# Altium PCB nse5310-module.PcbDoc
Units mm, origin at the board's own origin, x right, y up, seen from the top; angles counter-clockwise.
Board outline 25 x 25 mm, 2 copper layers (Top Layer, Bottom Layer), stack 1.581 mm thick; 20 components, 21 nets, 115 pads, 21 vias.
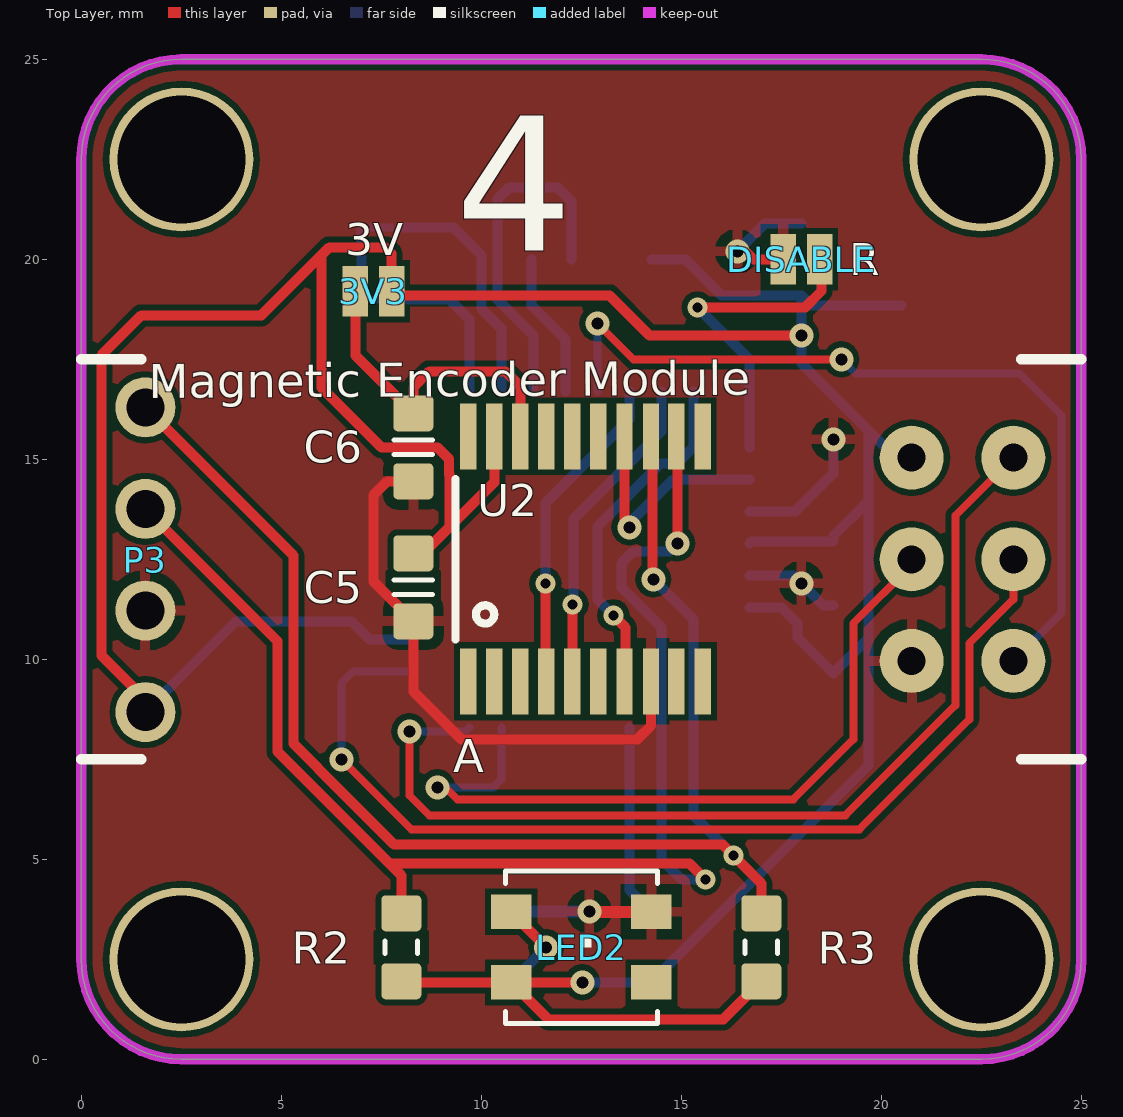
[diagram p0: Top Layer view]
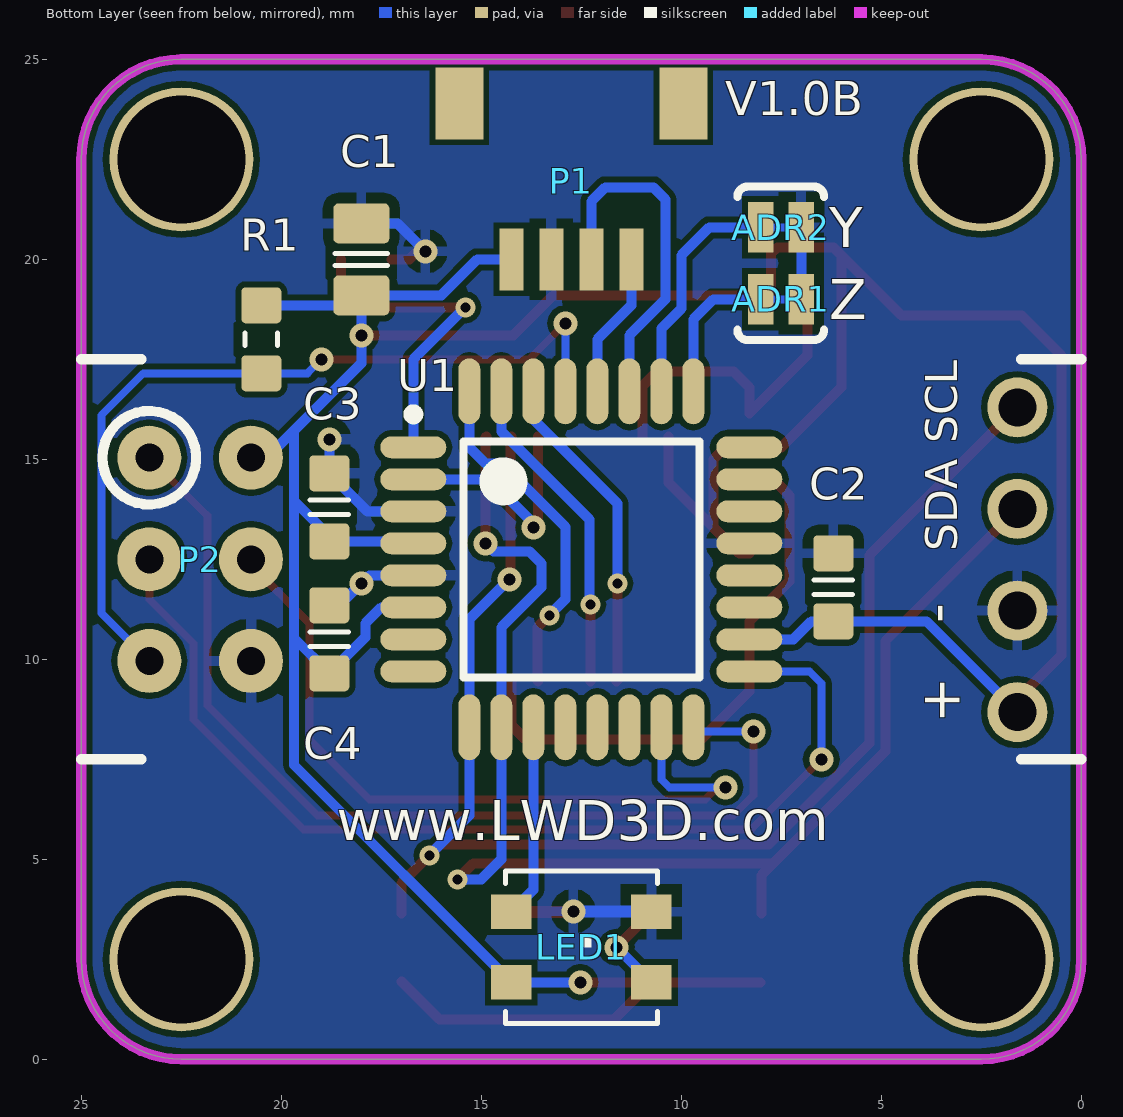
[diagram p1: Bottom Layer view, seen from below]
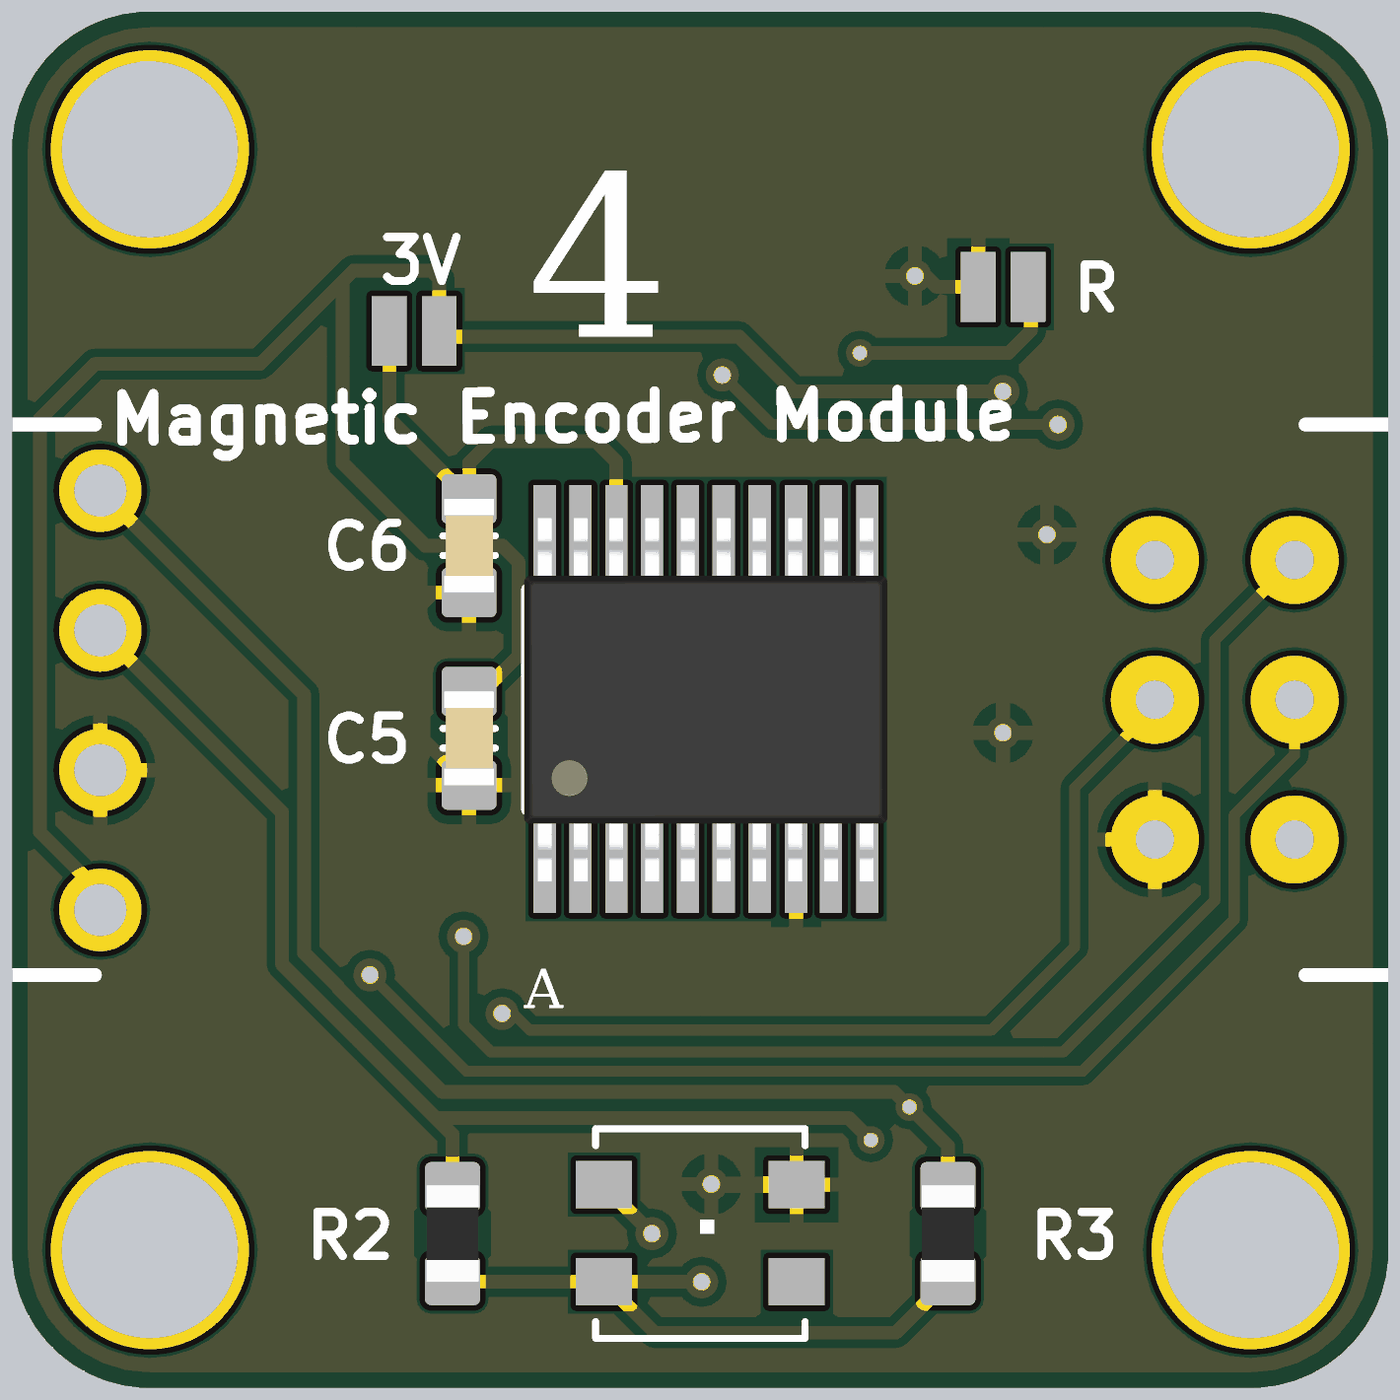
[diagram p2: 3D render of the assembled board from above, using the file's embedded part models]
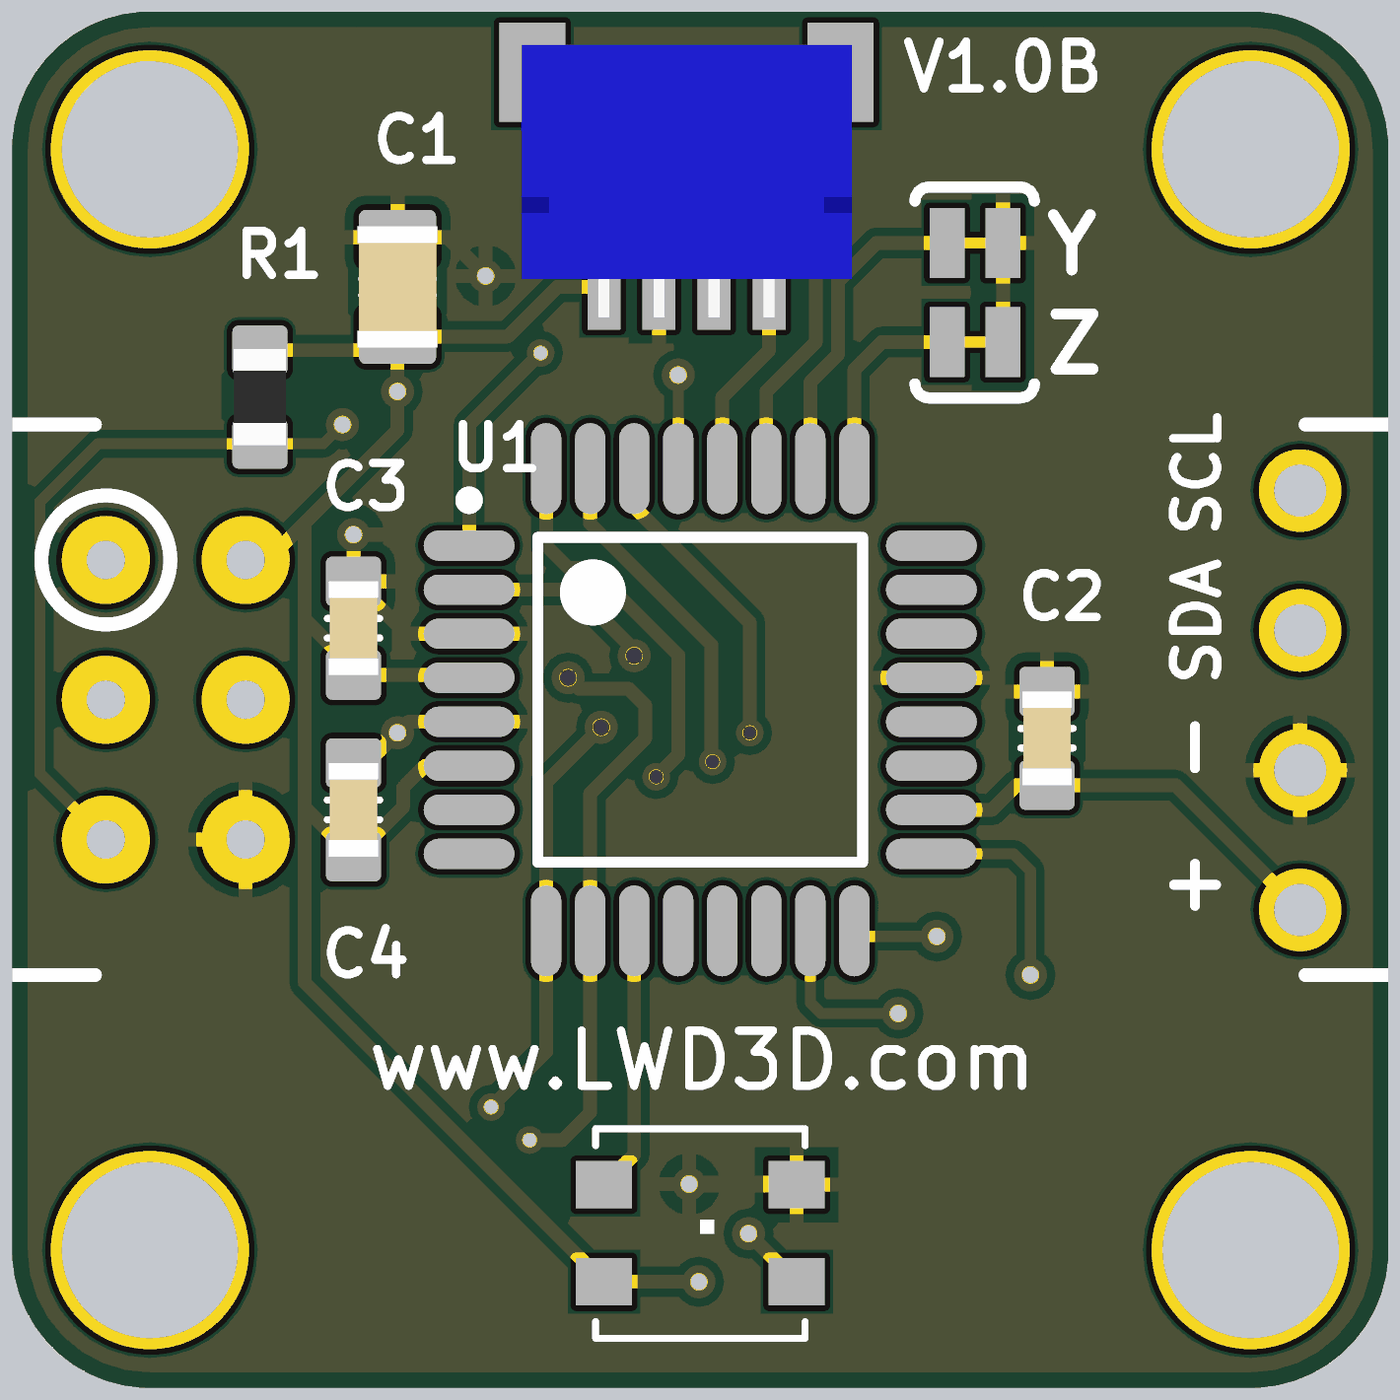
[diagram p3: 3D render of the assembled board from below, using the file's embedded part models]

## Layer stack, top to bottom
Top Solder: solder mask 0.0102, Solder Resist, Dk 3.5
Top Layer: signal copper 0.0356
Dielectric1: dielectric 1.51, FR-4, Dk 4.8
Bottom Layer: signal copper 0.0356
Bottom Solder: solder mask 0.0102, Solder Resist, Dk 3.5

## Board outline
0,2.5 0,22.5 cw(c2.5,22.5) 2.5,25 22.5,25 cw(c22.5,22.5) 25,22.5 25,2.5 cw(c22.5,2.5) 22.5,0 2.5,0 cw(c2.5,2.5)

## Design rules (kind name [scope] priority, off if disabled: settings)
Clearance [All] p1: gap=0.15
FabricationTestPointUsage TestPointUsage [All] p1: valid=0 allowmultiple=FALSE
FabricationTestpoint Testpoint [All] p1: side=3 testpointundercomponent=TRUE minsize=1.016 maxsize=2.54 preferedsize=1.524 minholesize=0 maxholesize=1.016 preferedholesize=0.813 testpointgrid=0.025 allowsidetop=TRUE allowsidebottom=TRUE usegrid=TRUE gridtolerance=0
HoleSize [All] p1: absolutevalues=TRUE maxlimit=3.5 minlimit=0.025 maxpercent=80.000 minpercent=20.000
PolygonConnect [All] p1: connectstyle=Relief reliefconductorwidth=0.254 reliefentries=4 polygonreliefangle="90 Angle" airgapwidth=0.254
RoutingVias [All] p1: holewidth=0.25 width=0.5 viastyle="Through Hole" minholewidth=0.25 minwidth=0.5 maxholewidth=1 maxwidth=1.4
SilkToSolderMaskClearance SilkscreenOverComponentPads [IsPad] p1: minsilkscreentomaskgap=0.254 clearancetoexposedcopper=TRUE
SolderMaskExpansion [All] p1: expansion=0.102
Width [All] p1: maxlimit=1 minlimit=0.2 preferedwidth=0.25
26 further rules are at their usual default settings.

## Components (designator, comment, footprint, x,y, rotation, side; value= is the part's Value field where it differs from the comment)
3V3 "JUMPER-PAD-2-NO" PAD-JUMPER-2-NO_NO_SILK 7.3,19.2 r0 top
ADR1 "JUMPER-PAD-2-NC_BY_TRACE" PAD-JUMPER-2-NC_BY_TRACE_YES_SILK 7.508,19 r0 bottom
ADR2 "JUMPER-PAD-2-NC_BY_TRACE" PAD-JUMPER-2-NC_BY_TRACE_YES_SILK 7.508,20.8 r0 bottom
C1 "approved sub OK" CAPC2012X135N 18,20 r90 bottom
C2 "approved sub OK" CAPC1608X90N 6.2,11.8 r90 bottom
C3 "approved sub OK" CAPC1608X90N 18.8,13.8 r90 bottom
C4 "approved sub OK" CAPC1608X90N 18.8,10.5 r90 bottom
C5 "approved sub OK" CAPC1608X90N 8.3,11.8 r270 top
C6 "approved sub OK" CAPC1608X90N 8.3,15.3 r270 top
DISABLE "JUMPER-PAD-2-NO" PAD-JUMPER-2-NO_NO_SILK 18,20 r0 top
LED1 "WS2812B3535" LED3535 12.5,2.8 r180 bottom
LED2 "WS2812B3535" LED3535 12.5,2.8 r0 top
P1 "JST-SH 4P" SM04B-SRSS-TB 14.25,20 r90 bottom
P2 "ISP" "ICSP Pads" 23.3,15.04 r180 bottom
P3 "Header 4" HDR1X4 1.6,16.3 r270 top
R1 "Thick Film" RESC1608X55N 20.5,18 r270 bottom
R2 "Thick Film" RESC1608X55N 8,2.8 r90 top
R3 "Thick Film" RESC1608X55N 17,2.8 r90 top
U1 "ATmega328-AU" 32A_N 12.5,12.5 r180 bottom
U2 "NSE-5310" NSE-5310 13.25,12.5 r0 top

## Footprints (in the part's own frame and the unit in brackets; to place one, negate y for a bottom-side part, rotate by r counter-clockwise, add the part's x,y. Pads: shape width x height; smd on the part's side, far side on the other; paste and mask are expansions set on the pad)
32A_N [mm] "Thin QFP, 32-Leads, Body 7x7mm, Pitch 0.8mm, IPC Medium Density"
  oval 1.65x0.55 smd: 1(-4.2,2.8) 2(-4.2,2) 3(-4.2,1.2) 4(-4.2,0.4) 5(-4.2,-0.4) 6(-4.2,-1.2) 7(-4.2,-2) 8(-4.2,-2.8) 17(4.2,-2.8) 18(4.2,-2) 19(4.2,-1.2) 20(4.2,-0.4) 21(4.2,0.4) 22(4.2,1.2) 23(4.2,2) 24(4.2,2.8)
  oval 0.55x1.65 smd: 9(-2.8,-4.2) 10(-2,-4.2) 11(-1.2,-4.2) 12(-0.4,-4.2) 13(0.4,-4.2) 14(1.2,-4.2) 15(2,-4.2) 16(2.8,-4.2) 25(2.8,4.2) 26(2,4.2) 27(1.2,4.2) 28(0.4,4.2) 29(-0.4,4.2) 30(-1.2,4.2) 31(-2,4.2) 32(-2.8,4.2)
  silkscreen extent -4.33,-2.95 2.95,3.75, body extent -3.5,-3.5 3.5,3.5, height 1.2
CAPC1608X90N [mm] "Chip Capacitor, Body 1.6x0.8mm, EIA 0603, IPC Medium Density"
  round 0.254 on Mech15: 0(0,0)
  rrect25% 0.9x1 smd: 1(-0.85,0) 2(0.85,0)
  Top Layer pour cut-out: -0.6,0.5 -0.4,0.7 0.4,0.7 0.6,0.5 0.6,-0.5 0.4,-0.7 -0.4,-0.7 -0.6,-0.5
  silkscreen extent -0.18,-0.48 0.18,0.48, body extent -0.85,-0.45 0.85,0.45, height 0.89
CAPC2012X135N [mm] "Chip Capacitor, Body 2.0x1.2mm, EIA 0805, IPC Medium Density"
  round 0.254 on Mech15: 0(0,0)
  rrect25% 1x1.4 smd: 1(-0.9,0) 2(0.9,0)
  Top Layer pour cut-out: -0.675,0.7 -0.475,0.9 0.475,0.9 0.675,0.7 0.675,-0.7 0.475,-0.9 -0.475,-0.9 -0.675,-0.7
  silkscreen extent -0.15,-0.65 0.15,0.65, body extent -1.1,-0.72 1.1,0.73, height 1.34
HDR1X4 [mm] "Connector; Header; 4 Position"
  round 1.5 hole 0.95: 1(0,0) 2(2.54,0) 3(5.08,0) 4(7.62,0)
"ICSP Pads" [mm]
  round 1.6 hole 0.7: 0(0,0) 1(2.54,0) 2(0,-2.54) 3(2.54,-2.54) 4(0,-5.08) 5(2.54,-5.08)
  silkscreen extent -1.17,-1.17 1.17,1.17
LED3535 [mil]
  rect 40x34 smd: 1(-68.9,35) 2(-68.9,-34.45) 3(69,-34.45) 4(69,35)
  silkscreen extent -75,-75 75,75
NSE-5310 [mil]
  rect 16x65 smd: 1(-140.75,-120.08) 2(-115.16,-120.08) 3(-89.57,-120.08) 4(-63.98,-120.08) 5(-38.39,-120.08) 6(-12.8,-120.08) 7(13,-120.08) 8(39,-120.08) 9(64,-120.08) 10(90,-120.08) 11(90,121) 12(64,121) 13(39,121) 14(13,121) 15(-12.8,121) 16(-38.39,121) 17(-63.98,121) 18(-89.57,121) 19(-115.16,121) 20(-140.75,121)
  silkscreen extent -154,-79 -115,79, body extent -156,-130 104,130, height 47
PAD-JUMPER-2-NC_BY_TRACE_YES_SILK [mm]
  rect 0.635x1.27 smd: 1(-0.508,0) 2(0.508,0)
  silkscreen extent -1.08,0.76 1.09,1.02
PAD-JUMPER-2-NO_NO_SILK [mm]
  rect 0.635x1.27 smd: 1(-0.45,0) 2(0.457,0)
RESC1608X55N [mm] "Chip Resistor, Body 1.6x0.8mm, EIA 0603, IPC Medium Density"
  round 0.254 on Mech15: 0(0,0)
  rrect25% 0.9x1 smd: 1(-0.85,0) 2(0.85,0)
  Top Layer pour cut-out: -0.6,0.5 -0.4,0.7 0.4,0.7 0.6,0.5 0.6,-0.5 0.4,-0.7 -0.4,-0.7 -0.6,-0.5
  silkscreen extent -0.15,-0.41 0.15,0.41, body extent -0.87,-0.47 0.88,0.48, height 0.54
SM04B-SRSS-TB [mm]
  rect 1.55x0.6 smd: 0(0,0) 1(0,-1) 2(0,-2) 3(0,-3)
  rect 1.8x1.2 smd: ""(3.9,-4.3) ""(3.9,1.3)
  body extent -0.55,-4.5 4.4,1.5, height 2.96

## Part data
C1: library part CAPC_10u_0805_10V, "Capacitor SMD Cer 10uF 10% 10V X5R 0805"
C2 C3 C4 C5: library part CAPC_100n_0603_X7R_50V_10%, "Capacitor SMD Cer 100nF 10% 50V X7R 0603"
C6: library part CAPC_2u2_0603_10V_10%, "Capacitor SMD Cer 2.2uF 10% 10V X5R 0603"
P1: library part SM04B-SRSS-TB
P2: library part "ISP Header"
P3: "Header, 4-Pin"
R1: library part RES_10K_0603_5%, "Resistor SMD chip 10k Ohm 0.1W 5% 0603"
R2 R3: library part RES_3K3_0603_5%, "Resistor SMD chip 3.3k Ohm 0.1W 5% 0603"
U1: "8-bit AVR Microcontroller, 32KB Flash, 1KB EEPROM, 2KB SRAM, 32-pin TQFP, Industrial Grade (-40°C to 85°C)"

## Free pads (board coordinates)
  round 3.6 hole 3.2: 0(2.5,2.5) 0(2.5,22.5) 0(22.5,2.5) 0(22.5,22.5)

## Via types
v1: diameter 0.6, hole 0.3, Top Layer to Bottom Layer, tented both sides, 15 vias
v2: diameter 0.5, hole 0.25, Top Layer to Bottom Layer, tented both sides, 6 vias

## Nets (pads, with @x,y where several pads share a name; then routed paths per layer and width w, separated by ;. In a path a pad name is that pad's centre, name@x,y a point inside that pad or via, vN(x,y) a via of type N, cw(c..) or ccw(c..) an arc to the next point about the centre after c; other vN are vias at no path point)
A: U1.30 U2.4 | length 8.1
  Top Layer w0.25: v2(11.6,11.9) 11.6,9.475 U2.4
  Bottom Layer w0.25: v2(11.6,11.9) 11.6,13.9 13.7,16 U1.30
ADR1: ADR1.2 U1.25 | length 3.5
  Bottom Layer w0.25: ADR1.2@8.183,19 9.2,19 9.7,18.5 U1.25
ADR2: ADR2.2 U1.26 | length 5.9
  Bottom Layer w0.25: ADR2.2 9.3,20.8 10,20.1 10,18.766 10.5,18.266 U1.26
B: U1.31 U2.5 | length 8.2
  Top Layer w0.25: U2.5 v2(12.275,11.375)
  Bottom Layer w0.25: v2(12.275,11.375) 12.3,11.4 12.3,13.5 14.5,15.7 U1.31
CLK: P3.1 R3.2 U1.9 U2.13 | length 35.2
  Top Layer w0.25: P3.1 5.3,12.6 5.3,7.9 5.925,7.275 5.925,7.262 7.812,5.375 16.025,5.375 v2(16.3,5.1) 17,4.4 R3.2 ; U2.13 14.275,15.539 14.275,12.025 v1(14.3,12)
  Bottom Layer w0.25: v1(14.3,12) 15.3,11 U1.9 15.3,6.1 v2(16.3,5.1)
CSN: U1.2 U2.14 | length 5.9
  Top Layer w0.25: U2.14 13.58,13.42 v1(13.7,13.3)
  Bottom Layer w0.25: v1(13.7,13.3) 13.7,13.4 14.8,14.5 U1.2
DIO: P3.2 R2.2 U1.10 U2.12 | length 34.2
  Top Layer w0.25: P3.2 4.9,10.46 4.9,7.7 7.7,4.9 ; R2.2 8,4.6 7.7,4.9 ; U2.12 14.9,15.549 v1(14.9,12.9) ; v2(15.6,4.5) 15.2,4.9 7.7,4.9
  Bottom Layer w0.25: v1(14.9,12.9) 14.7,12.7 13.8,12.7 13.5,12.4 13.5,11.8 14.5,10.8 U1.10 14.5,5 15,4.5 v2(15.6,4.5)
GND: ADR1.1 ADR2.1 C1.2 C2.2 C3.2 C4.2 C5.2 C6.2 DISABLE.1 LED1.4 LED2.4 P1.1 P2.5 P3.3 U1.3 U1.5 U1.21 U2.8 | length 28
  Top Layer w0.25: C6.2 7.65,14.45 7.3,14.1 7.3,11.95 C5.2 8.3,9.2 9.5,8 13.9,8 14.241,8.341 U2.8 ; v1(16.4,20.2) 16.6,20.2 16.8,20 DISABLE.1@17.242,20
  Top Layer w0.3: v1(12.7,3.7) 12.711,3.689 LED2.4
  Bottom Layer w0.25: ADR1.1 ADR2.1 ; v1(16.4,20.2) 17.1,20.9 C1.2 ; U1.5 17.8,12.1 v1(18,11.9) 18.55,11.35 C4.2 ; U1.3 17.85,13.7 C3.2 v1(18.8,15.5)
  Bottom Layer w0.3: LED1.4@10.758,3.7 v1(12.7,3.7)
I: U1.32 U2.7 | length 8.8
  Top Layer w0.25: v2(13.3,11.1) 13.6,10.8 13.6,9.47 U2.7
  Bottom Layer w0.25: v2(13.3,11.1) 12.9,11.5 12.9,13.313 14.487,14.9 14.9,14.9 15.3,15.3 U1.32
MISO: P2.0 U1.16 | length 24.9
  Top Layer w0.2: v1(8.2,8.2) 8.2,6.6 8.7,6.1 19.1,6.1 21.85,8.85 21.85,13.59 P2.0
  Bottom Layer w0.2: v1(8.2,8.2) 9.6,8.2 U1.16
MOSI: P2.3 U1.15 | length 19.2
  Top Layer w0.2: v1(8.9,6.8) 9.1,6.8 9.4,6.5 17.8,6.5 19.3,8 19.3,10.9 20.76,12.36 P2.3
  Bottom Layer w0.2: v1(8.9,6.8) 10.3,6.8 10.5,7 U1.15
NEOPIXEL: LED2.3
Net3V3_1: 3V3.1 C6.1 U2.18 | length 8.4
  Top Layer w0.25: 3V3.1@6.85,19.1 6.85,17.6 C6.1 8.3,16.8 8.7,17.2 10.6,17.2 10.975,16.825 U2.18
NetDISABLE_2: DISABLE.2 U1.1 | length 8.1
  Top Layer w0.25: v2(15.4,18.8) 18.1,18.8 18.508,19.208 DISABLE.2@18.508,20
  Bottom Layer w0.25: v2(15.4,18.8) 16.7,17.5 U1.1
NetLED1_3: LED1.3 LED2.1 | length 2.5
  Top Layer w0.25: LED2.1 10.75,3.672 v1(11.622,2.8)
  Bottom Layer w0.25: LED1.3 v1(11.622,2.8)
RST: P2.4 R1.2 U1.29 | length 20.9
  Top Layer w0.2: v1(12.9,18.4) 13.8,17.5 v1(19,17.5)
  Bottom Layer w0.2: U1.29 v1(12.9,18.4) ; v1(19,17.5) 19.35,17.15 R1.2 23.45,17.15 24.5,16.1 24.5,11.16 P2.4
SCK: P2.2 U1.17 | length 25.8
  Top Layer w0.2: v1(6.5,7.5) 8.25,5.75 19.45,5.75 22.2,8.5 22.2,10.4 23.3,11.5 P2.2
  Bottom Layer w0.2: v1(6.5,7.5) 6.5,9.4 6.8,9.7 U1.17
SCL: P1.3 U1.28 | length 3.7
  Bottom Layer w0.25: P1.3 11.25,18.85 12.1,18 U1.28
SDA: P1.2 U1.27 | length 8.7
  Bottom Layer w0.25: U1.27 11.3,18.1 10.4,19 10.4,21.5 10.7,21.8 11.9,21.8 12.25,21.45 P1.2
VCC: 3V3.2 C1.1 C2.1 C3.1 C4.1 C5.1 LED1.2 LED2.2 P1.0 P2.1 P3.4 R1.1 R2.1 R3.1 U1.4 U1.6 U1.18 U2.19 | length 99.3
  Top Layer w0.25: P3.4 1.6,9 0.5,10.1 0.5,17.6 1.5,18.6 4.5,18.6 6,20.1 ; 3V3.2@7.757,19.1 13.2,19.1 14.2,18.1 v1(18,18.1) ; 3V3.2 7.757,20.143 7.6,20.3 6.2,20.3 6,20.1 ; R2.1@8.025,1.925 LED2.2 ; C5.1 8.55,12.65 9.2,13.3 ; U2.19 10.325,14.425 9.2,13.3 ; v1(12.525,1.925) LED2.2 ; R3.1 16.05,1 11.675,1 LED2.2 ; 6,20.1 6,16.8 7.5,15.3 8.9,15.3 9.197,15.003 9.197,14.631 9.2,14.628 9.2,13.3
  Bottom Layer w0.25: P3.4 3.87,10.95 C2.1 6.75,10.95 7.2,10.5 U1.18 ; v1(12.525,1.925) LED1.2 19.685,7.36 19.685,10.535 ; P1.0 15.1,20 16,19.1 C1.1 ; U1.6 17.5,11.3 17.9,10.9 17.9,10.55 C4.1 19.685,10.535 ; U1.4 16.75,12.95 C3.1 18.8,13.08 19.685,13.965 ; R1.1 18.25,18.85 C1.1 ; P2.1 20.36,15.04 19.7,15.7 ; C1.1 v1(18,18.1) 18,17.4 19.7,15.7 ; 19.685,10.535 19.685,13.965 ; 19.685,13.965 19.685,15.685 19.7,15.7
WS2812B: LED1.1 U1.11 | length 4.8
  Bottom Layer w0.25: U1.11 13.7,4.239 LED1.1
pads on no net: C1.0 C2.0 C3.0 C4.0 C5.0 C6.0 P1. R1.0 R2.0 R3.0 U1.7 U1.8 U1.12 U1.13 U1.14 U1.19 U1.20 U1.22 U1.23 U1.24 U2.1 U2.2 U2.3 U2.6 U2.9 U2.10 U2.11 U2.15 U2.16 U2.17 U2.20

## Polygon pours and split planes (outlines as drawn)
GND on Bottom Layer "Bottom Layer-GND" (solid, pour order 0): 25,25 25,0 0,0 0,25
GND on Top Layer "Top VCC" (solid, pour order 2): 25,25 25,0 0,0 0,25

## Keep-outs
Keep-Out Layer:
  the board outline again, w0.254

## Other copper
Bottom Layer:
  rectangle: 7,18.9 7.908,19.1
  rectangle net ADR2: 7.208,20.7 7.808,20.9

## Silkscreen, mask and mechanical layers (free items; w line width, h text height)
Top Overlay:
  lines w0.254: 0,7.5 1.5,7.5 ; 0,17.5 1.5,17.5 ; 23.5,7.5 25,7.5 ; 23.5,17.5 25,17.5
  text "3V" at 6.6,20.1 h0.8
  text "R" at 19.2,19.6 h0.8
  text "4" at 9.35,19.1 h5.8
  text "Magnetic Encoder Module" at 1.684,16.523 h0.85 r0.31
  text "A" at 9.3,6.9 h1.4
Bottom Overlay:
  lines w0.254: 0,7.5 1.5,7.5 ; 0,17.5 1.5,17.5 ; 23.5,7.5 25,7.5 ; 23.5,17.5 25,17.5
  text "V1.0B" at 8.9,23.6 h0.85
  text "Y" at 6.308,20.3 h1
  text "Z" at 6.308,18.5 h1
  text "SCL" at 3.1,15.4 h0.8 r270
  text "SDA" at 3.1,12.7 h0.8 r270
  text "-" at 3.9,10.9 h1 r90
  text "+" at 3.9,8.4 h1 r90
  text "www.LWD3D.com" at 18.61,5.48 h1
Bottom Solder:
  rectangle: 7.208,18.8 7.708,19.2
  rectangle: 7.208,20.6 7.708,21
Mechanical 4:
  circle w0.254: c22.5,22.5 r3
  circle w0.254: c22.5,2.5 r3
  circle w0.254: c2.5,2.5 r3
  circle w0.254: c2.5,22.5 r3
  circle w0.254: c22.5,22.5 r1.6
  text "Hole Diameter" at 29,21 h1
  text "Bolt Clearance" at 28,1 h1
  text "All units are in millimetres" at 0,-3 h1
Mechanical 16:
  drawing of 1874 lines, arcs and shapes, not listed
  text "1" at -84.785,94.869 h1.78
  text "2" at -12.141,94.869 h1.78
  text "3" at 61.011,94.869 h1.78
  text "4" at 133.909,94.869 h1.78
  text "A" at -119.126,71.857 h1.78
  text "A" at 167.894,71.857 h1.78
  text "B" at -119.126,23.8 h1.78
  text "B" at 167.894,23.8 h1.78
  text "C" at -119.126,-24.714 h1.78
  text "C" at 167.894,-24.714 h1.78
  text "ENGINEER:" at 52.959,-61.722 h1.14
  text "TITLE:" at 91.059,-61.722 h1.14
  text "PCB DESIGNER:" at 52.959,-69.215 h1.14
  text "D" at -119.126,-72.72 h1.78
  text "D" at 167.894,-72.72 h1.78
  text "DATE:" at 52.959,-76.962 h1.14
  text "PART NO.:" at 91.059,-76.962 h1.14
  text "REV:" at 144.399,-76.962 h1.14
  text "Altium Limited" at 19.939,-79.502 h1.78
  text ".PRINT_DATE" at 54.229,-80.01 h1.78
  text "12a Rodborough Rd" at 19.939,-82.042 h1.78
  text "Frenchs Forest" at 19.939,-84.582 h1.78
  text "FILE NAME:" at 52.959,-84.582 h1.14
  text "DWG NO:" at 91.059,-84.582 h1.14
  text "SCALE:" at 144.399,-84.582 h1.14
  text "NSW 2086" at 19.939,-87.122 h1.78
  text ".PCB_FILE_NAME_NO_PATH" at 54.229,-87.63 h1.78
  text "1" at -84.785,-93.091 h1.78
  text "2" at -12.141,-93.091 h1.78
  text "3" at 61.011,-93.091 h1.78
  text "4" at 133.909,-93.091 h1.78

## Dimensions
2.5,22.5 to 2.5,2.5 on Mechanical 16
22.5,2.5 to 41,4 on Mechanical 4
22.5,22.5 to 41,24 on Mechanical 4
2.5,25 to 2.5,0 on Mechanical 16
0,22.5 to 25,22.5 on Mechanical 16
2.5,22.5 to 22.5,22.5 on Mechanical 16